# Altium PCB RoboMate.PcbDoc
Units mm, origin at the board's own origin, x right, y up, seen from the top; angles counter-clockwise.
Board outline 33.27 x 28.45 mm, 2 copper layers (Top Layer, Bottom Layer); 43 components, 18 nets, 128 pads, 361 vias.
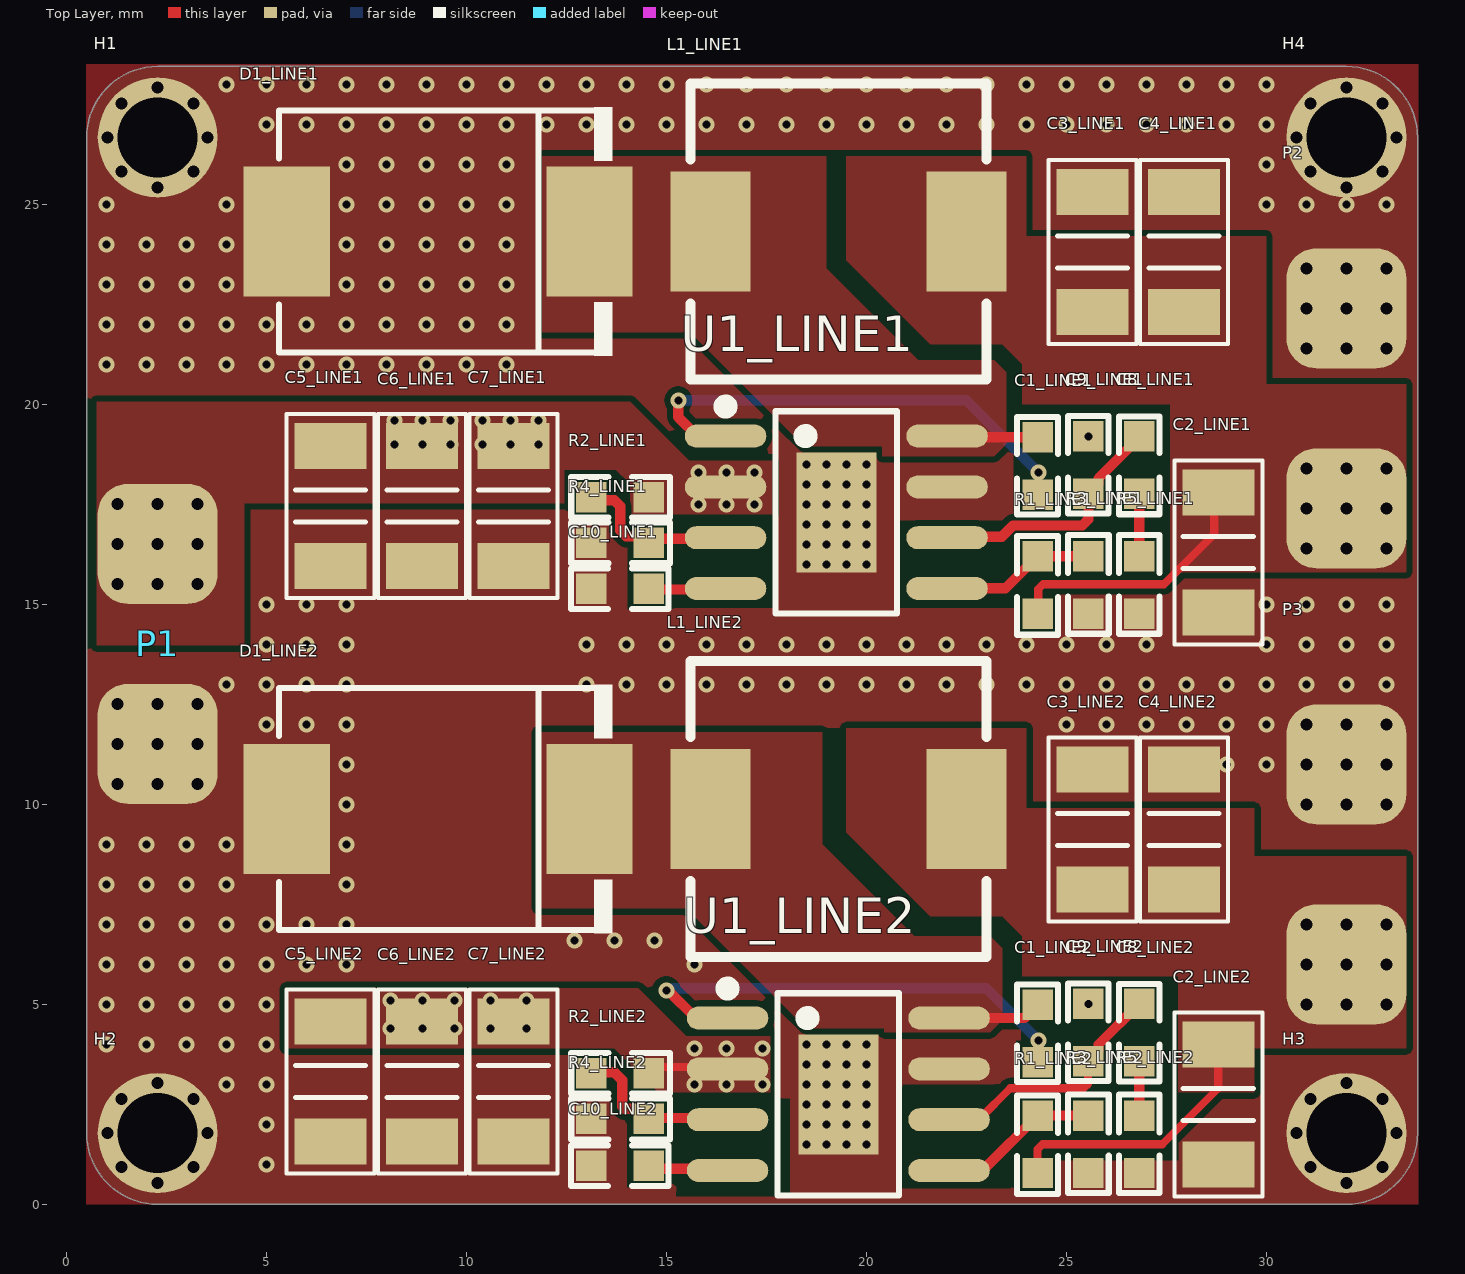
[diagram p0: Top Layer view]
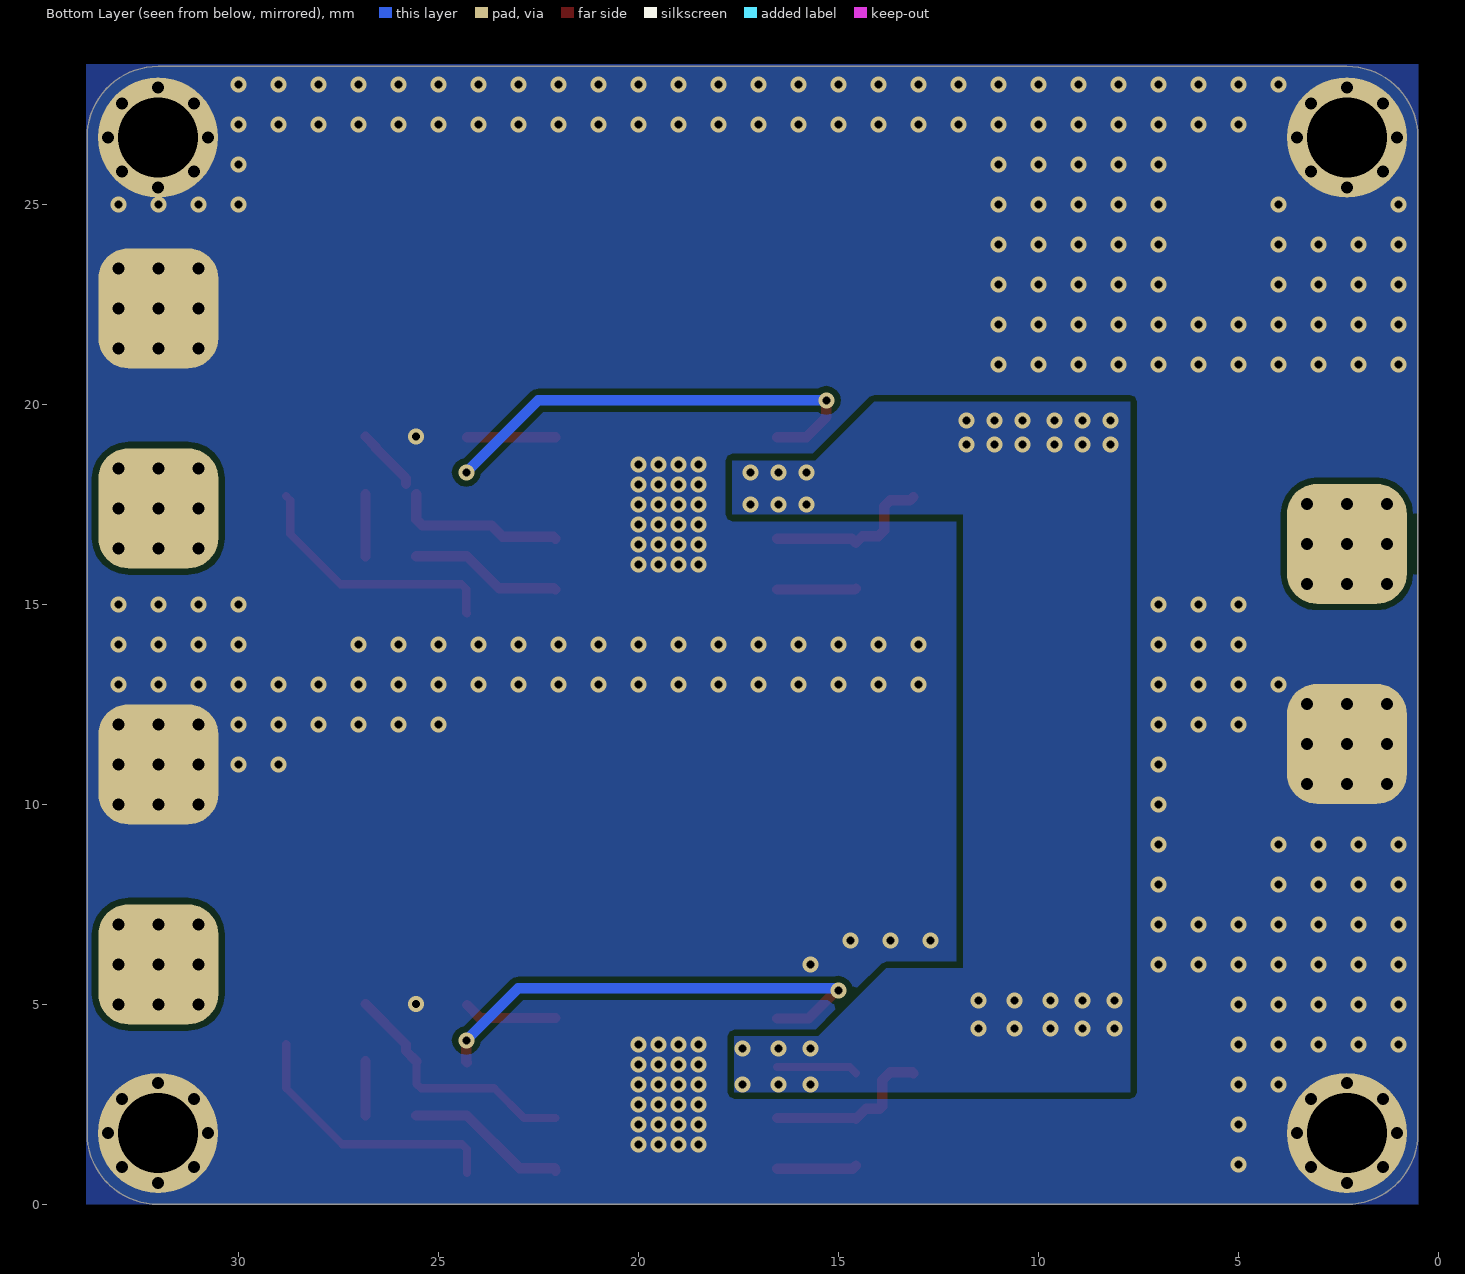
[diagram p1: Bottom Layer view, seen from below]
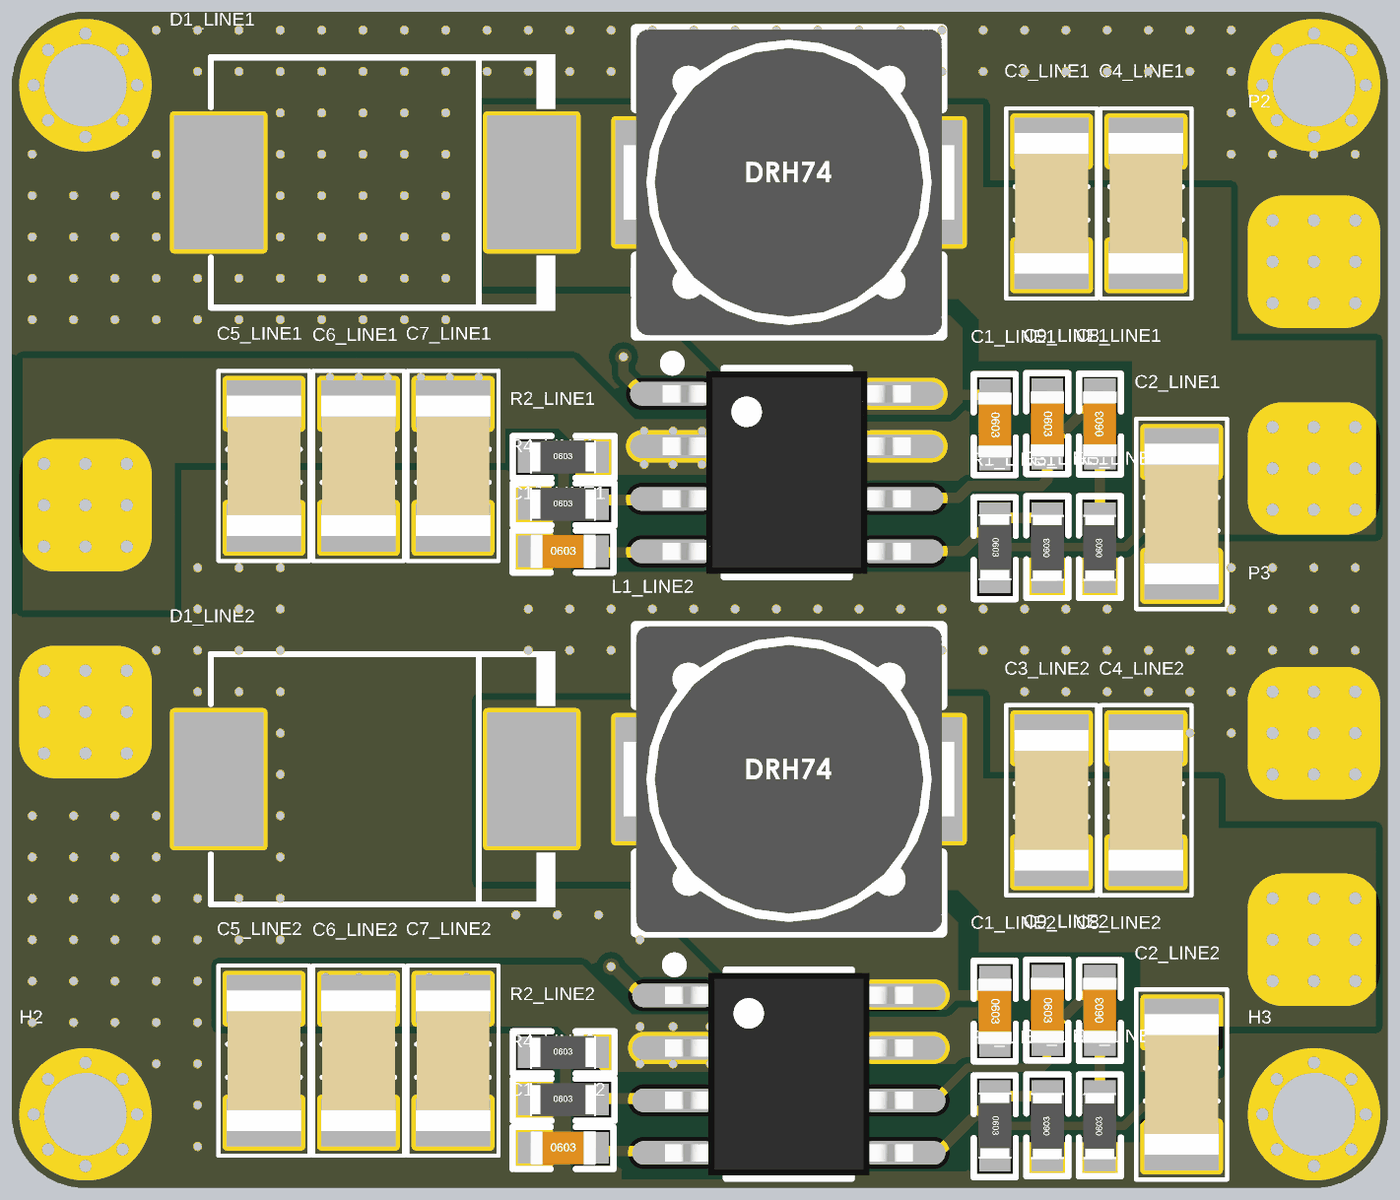
[diagram p2: 3D render of the assembled board from above, using the file's embedded part models]

## Layer stack, top to bottom
Top Solder: solder mask 0.0102, Solder Resist, Dk 3.5
Top Layer: signal copper 0.0356
Dielectric 1: dielectric 0.32, FR-4, Dk 4.8
Bottom Layer: signal copper 0.0356
Bottom Solder: solder mask 0.0102, Solder Resist, Dk 3.5

## Board outline
0.508,1.778 ccw(c2.286,1.778) 2.286,0 32.004,0 ccw(c32.004,1.778) 33.782,1.778 33.782,26.67 ccw(c32.004,26.67) 32.004,28.448 2.286,28.448 ccw(c2.286,26.67) 0.508,26.67

## Design rules (kind name [scope] priority, off if disabled: settings)
Clearance [All] p1: gap=0.152 ignorepadtopadclearanceinfootprint=FALSE
PlaneClearance [All] p1: clearance=0.102
PlaneConnect [All] p1: planeconnectstyle=Direct reliefexpansion=0.508 reliefentries=4 reliefconductorwidth=0.254 reliefairgap=0.254
PolygonConnect [All] p1: connectstyle=Direct reliefconductorwidth=0.254 reliefentries=4 polygonreliefangle="90 Angle" airgapwidth=0.254
RoutingVias [All] p1: holewidth=0.711 width=1.27 viastyle="Through Hole" minholewidth=0.711 minwidth=1.27 maxholewidth=0.711 maxwidth=1.27
SolderMaskExpansion [All] p1: expansion=0.102 istentingtop=FALSE
Width [All] p1: maxlimit=0.254 minlimit=0.203 preferedwidth=0.254
28 further rules are at their usual default settings.

## Classes and differential pairs
channel class Main: LINE1 LINE2
component class Top: H1 H2 H3 H4 P1 P2 P3
component class LINE2: C1_LINE2 C2_LINE2 C3_LINE2 C4_LINE2 C5_LINE2 C6_LINE2 C7_LINE2 C8_LINE2 C9_LINE2 C10_LINE2 D1_LINE2 L1_LINE2 R1_LINE2 R2_LINE2 R3_LINE2 R4_LINE2 R5_LINE2 U1_LINE2
component class LINE1: C1_LINE1 C2_LINE1 C3_LINE1 C4_LINE1 C5_LINE1 C6_LINE1 C7_LINE1 C8_LINE1 C9_LINE1 C10_LINE1 D1_LINE1 L1_LINE1 R1_LINE1 R2_LINE1 R3_LINE1 R4_LINE1 R5_LINE1 U1_LINE1

## Components (designator, comment, footprint, x,y, rotation, side; value= is the part's Value field where it differs from the comment)
C1_LINE1 "100nF" "C 0603" 24.282,18.453 r270 top (schematic designator C1)
C1_LINE2 "100nF" "C 0603" 24.282,4.269 r270 top (schematic designator C1)
C2_LINE1 "22uF" 1206-C 28.8,16.3 r90 top (schematic designator C2)
C2_LINE2 "22uF" 1206-C 28.8,2.5 r90 top (schematic designator C2)
C3_LINE1 "22uF" 1206-C 25.654,23.812 r270 top (schematic designator C3)
C3_LINE2 "22uF" 1206-C 25.654,9.374 r270 top (schematic designator C3)
C4_LINE1 "22uF" 1206-C 27.94,23.812 r270 top (schematic designator C4)
C4_LINE2 "22uF" 1206-C 27.94,9.374 r270 top (schematic designator C4)
C5_LINE1 "10UF" 1206-C 6.604,17.462 r90 top (schematic designator C5)
C5_LINE2 "10UF" 1206-C 6.604,3.075 r90 top (schematic designator C5)
C6_LINE1 "10UF" 1206-C 8.89,17.462 r90 top (schematic designator C6)
C6_LINE2 "10UF" 1206-C 8.89,3.075 r90 top (schematic designator C6)
C7_LINE1 "10NF" 1206-C 11.176,17.462 r90 top (schematic designator C7)
C7_LINE2 "10NF" 1206-C 11.176,3.075 r90 top (schematic designator C7)
C8_LINE1 "2.2nf" "C 0603" 26.822,18.478 r90 top (schematic designator C8)
C8_LINE2 "2.2nf" "C 0603" 26.822,4.294 r90 top (schematic designator C8)
C9_LINE1 "22pf" "C 0603" 25.552,18.478 r270 top (schematic designator C9)
C9_LINE2 "22pf" "C 0603" 25.552,4.294 r270 top (schematic designator C9)
C10_LINE1 "10NF" "C 0603" 13.843,15.392 r0 top (schematic designator C10)
C10_LINE2 "10nf" "C 0603" 13.843,0.965 r0 top (schematic designator C10)
D1_LINE1 "SS35" SMC_L6.9-W5.9-LS7.9-RD 9.296,24.32 r180 top (schematic designator D1)
D1_LINE2 "SS35" SMC_L6.9-W5.9-LS7.9-RD 9.296,9.882 r180 top (schematic designator D1)
H1 "" 铜柱-M2 2.286,26.67 r0 top
H2 "" 铜柱-M2 2.286,1.778 r0 top
H3 "" 铜柱-M2 32.004,1.778 r0 top
H4 "" 铜柱-M2 32.004,26.67 r0 top
L1_LINE1 "4.7uH" L-CDRH74R 19.304,24.32 r0 top (schematic designator L1)
L1_LINE2 "4.7uH" L-CDRH74R 19.304,9.882 r0 top (schematic designator L1)
P1 "BATIN" "XT30-HF - HALF" 2.286,16.51 r270 top
P2 "VOUT1" "XT30-HF - HALF" 32,17.4 r90 top
P3 "VOUT2" "XT30-HF - HALF" 32,6 r90 top
R1_LINE1 "16.7k" "R 0603" 24.282,15.484 r270 top (schematic designator R1)
R1_LINE2 "16.7k" "R 0603" 24.282,1.5 r270 top (schematic designator R1)
R2_LINE1 "4.7k" "R 0603" 13.843,17.678 r0 top (schematic designator R2)
R2_LINE2 "4.7k" "R 0603" 13.843,3.277 r0 top (schematic designator R2)
R3_LINE1 "5.1k" "R 0603" 25.552,15.484 r90 top (schematic designator R3)
R3_LINE2 "5.1k" "R 0603" 25.552,1.5 r90 top (schematic designator R3)
R4_LINE1 "1k" "R 0603" 13.843,16.535 r0 top (schematic designator R4)
R4_LINE2 "1k" "R 0603" 13.843,2.134 r0 top (schematic designator R4)
R5_LINE1 "37.4k" "R 0603" 26.822,15.484 r90 top (schematic designator R5)
R5_LINE2 "37.4k" "R 0603" 26.822,1.5 r90 top (schematic designator R5)
U1_LINE1 "TPS54531DDAR" SOIC-8_L5.0-W4.0-P1.27-LS6.0-BL-EP 19.25,17.3 r270 top (schematic designator U1)
U1_LINE2 "TPS54531DDAR" SOIC-8_L5.0-W4.0-P1.27-LS6.0-BL-EP 19.3,2.75 r270 top (schematic designator U1)

## Footprints (in the part's own frame and the unit in brackets; to place one, negate y for a bottom-side part, rotate by r counter-clockwise, add the part's x,y. Pads: shape width x height; smd on the part's side, far side on the other; paste and mask are expansions set on the pad)
1206-C [mm] "Chip Capacitor, Body 3.2x1.6mm, 1206, IPC Medium Density"
  rect 1.15x1.8 smd: 1(-1.5,0) 2(1.5,0)
  silkscreen extent -2.3,-1.1 2.3,1.1, body extent -1.7,-0.9 1.7,0.9, height 1.74
"C 0603" [mil]
  rect 30x30 smd: 1(-28.25,0) 2(28.25,0)
  silkscreen extent -48,-20 48,20, body extent -31,-16 32,16, height 32
L-CDRH74R [mm]
  rect 2x3 smd: 1(-3.2,0) 2(3.2,0)
  silkscreen extent -3.7,-3.7 3.7,3.7, body extent -4,-3.7 4,3.7, height 4.5
"R 0603" [mil]
  rect 30x30 smd: 1(-28.25,0) 2(28.25,0)
  silkscreen extent -48,-20 49,20, body extent -32,-16 31,16, height 16
SMC_L6.9-W5.9-LS7.9-RD [mm]
  rect 2.158x3.24 smd: 1(3.786,0) 2(-3.786,0)
  silkscreen extent -4.36,-3.1 3.98,3.1
SOIC-8_L5.0-W4.0-P1.27-LS6.0-BL-EP [mm]
  oval 0.574x2.038 smd: 1(-1.905,-2.769) 2(-0.635,-2.769) 3(0.635,-2.769) 4(1.905,-2.769) 5(1.905,2.769) 6(0.635,2.769) 7(-0.635,2.769) 8(-1.905,2.769)
  rect 3x2 smd: 9(0,0)
  silkscreen extent -2.79,-2.92 2.53,1.52, body extent -2.45,-3 2.45,3, height 1.75
"XT30-HF - HALF" [mm]
  rrect50% 3x3 hole 0.3 unplated mask+0.102: 1(0,0) 2(5,0)
铜柱-M2 [mm] "TZ-M3"
  round 0.5 hole 0.3: 0(-1.25,0) 0(-0.9,-0.85) 0(-0.9,0.85) 0(0,-1.25) 0(0,1.25) 0(0.9,-0.85) 0(0.9,0.85) 0(1.25,0)
  round 3 hole 2: 0(0,0)

## Part data
C1_LINE1 C1_LINE2 C8_LINE1 C8_LINE2 C9_LINE1 C9_LINE2 C10_LINE1 C10_LINE2: library part C
C2_LINE1 C2_LINE2 C3_LINE1 C3_LINE2 C4_LINE1 C4_LINE2 C5_LINE1 C5_LINE2 C6_LINE1 C6_LINE2 C7_LINE1 C7_LINE2: library part CAP, "陶瓷电容"
D1_LINE1 D1_LINE2: library part "D Schottky", "Schottky Diode", Code_JEDEC=DO-214-AA, LatestRevisionDate=17-Jul-2002, LatestRevisionNote="Re-released for DXP Platform.", PackageReference=SMB, Published=8-Jun-2000, Publisher="Altium Limited"
H1 H2 H3 H4: library part HOLE
L1_LINE1 L1_LINE2: library part INDUCTOR-SMD, "贴片屏蔽电感"
P1 P2 P3: library part "Header 2", "Header, 2-Pin", LatestRevisionDate=17-Jul-2002, LatestRevisionNote="Re-released for DXP Platform.", Publisher="Altium Limited"
R1_LINE1 R1_LINE2 R2_LINE1 R2_LINE2 R3_LINE1 R3_LINE2 R4_LINE1 R4_LINE2 R5_LINE1 R5_LINE2: library part R
U1_LINE1 U1_LINE2: BOM_LCSC Assembly=Yes, BOM_Manufacturer=TI, BOM_Manufacturer Part=TPS79333DBVR, BOM_Supplier=LCSC, BOM_Supplier Part=C9840, image=//image.lceda.cn/szlcsc/C9840.jpg, SMT Type=Extend, spicePre=X, spiceSymbolName=TPS79333DBVR

## Via types
v1: diameter 0.4, hole 0.2, Top Layer to Bottom Layer, tented both sides, 307 vias
v2: diameter 0.5, hole 0.3, Top Layer to Bottom Layer, tented both sides, 54 vias

## Nets (pads, with @x,y where several pads share a name; then routed paths per layer and width w, separated by ;. In a path a pad name is that pad's centre, name@x,y a point inside that pad or via, vN(x,y) a via of type N, cw(c..) or ccw(c..) an arc to the next point about the centre after c; other vN are vias at no path point)
GND: C2_LINE1.1 C2_LINE2.1 C3_LINE1.1 C3_LINE2.1 C4_LINE1.1 C4_LINE2.1 C5_LINE1.1 C5_LINE2.1 C6_LINE1.1 C6_LINE2.1 C7_LINE1.1 C7_LINE2.1 C9_LINE1.1 C9_LINE2.1 C10_LINE1.1 C10_LINE2.1 D1_LINE1.1 D1_LINE2.1 H1.0 H2.0 H3.0 H4.0 P1.2 P2.2 P3.2 R3_LINE1.1 R3_LINE2.1 R4_LINE1.1 R4_LINE2.1 R5_LINE1.1 R5_LINE2.1 U1_LINE1.7 U1_LINE1.9 U1_LINE2.7 U1_LINE2.9
  other v1: 5,1 18.5,1.5 19,1.5 19.5,1.5 20,1.5 5,2 18.5,2 19,2 19.5,2 20,2 18.5,2.5 19,2.5 19.5,2.5 20,2.5 4,3 5,3 18.5,3 19,3 19.5,3 20,3 18.5,3.5 19,3.5 19.5,3.5 20,3.5 1,4 2,4 3,4 4,4 5,4 18.5,4 19,4 19.5,4 20,4 1,5 2,5 3,5 4,5 5,5 25.552,5.012 1,6 2,6 3,6 4,6 5,6 6,6 7,6 15.7,6 12.7,6.6 13.7,6.6 14.7,6.6 1,7 2,7 3,7 4,7 5,7 6,7 7,7 1,8 2,8 3,8 4,8 7,8 1,9 2,9 3,9 4,9 7,9 7,10 7,11 29,11 30,11 5,12 6,12 7,12 25,12 26,12 27,12 28,12 29,12 30,12 4,13 5,13 6,13 7,13 13,13 14,13 15,13 16,13 17,13 18,13 19,13 20,13 21,13 22,13 23,13 24,13 25,13 26,13 27,13 28,13 29,13 30,13 31,13 32,13 33,13 5,14 6,14 7,14 13,14 14,14 15,14 16,14 17,14 18,14 19,14 20,14 21,14 22,14 23,14 24,14 25,14 26,14 27,14 30,14 31,14 32,14 33,14 5,15 6,15 7,15 30,15 31,15 32,15 33,15 18.5,16 19,16 19.5,16 20,16 18.5,16.5 19,16.5 19.5,16.5 20,16.5 18.5,17 19,17 19.5,17 20,17 18.5,17.5 19,17.5 19.5,17.5 20,17.5 18.5,18 19,18 19.5,18 20,18 18.5,18.5 19,18.5 19.5,18.5 20,18.5 25.552,19.196 1,21 2,21 3,21 4,21 5,21 6,21 7,21 8,21 9,21 10,21 11,21 1,22 2,22 3,22 4,22 5,22 6,22 7,22 8,22 9,22 10,22 11,22 1,23 2,23 3,23 4,23 7,23 8,23 9,23 10,23 11,23 1,24 2,24 3,24 4,24 7,24 8,24 9,24 10,24 11,24 1,25 4,25 7,25 8,25 9,25 10,25 11,25 30,25 31,25 32,25 33,25 7,26 8,26 9,26 10,26 11,26 30,26 5,27 6,27 7,27 8,27 9,27 10,27 11,27 12,27 13,27 14,27 15,27 16,27 17,27 18,27 19,27 20,27 21,27 22,27 23,27 24,27 25,27 26,27 27,27 28,27 29,27 30,27 4,28 5,28 6,28 7,28 8,28 9,28 10,28 11,28 12,28 13,28 14,28 15,28 16,28 17,28 18,28 19,28 20,28 21,28 22,28 23,28 24,28 25,28 26,28 27,28 28,28 29,28 30,28
  other v2: 31,10 32,10 33,10 1.286,10.51 2.286,10.51 3.286,10.51 31,11 32,11 33,11 1.286,11.51 2.286,11.51 3.286,11.51 31,12 32,12 33,12 1.286,12.51 2.286,12.51 3.286,12.51 31,21.4 32,21.4 33,21.4 31,22.4 32,22.4 33,22.4 31,23.4 32,23.4 33,23.4
NetC1_LINE1_1: C1_LINE1.1 D1_LINE1.2 L1_LINE1.1 U1_LINE1.8 | length 2.2
  Top Layer w0.254: U1_LINE1.8@22.073,19.177 24.276,19.177 C1_LINE1.1
NetC1_LINE1_2: C1_LINE1.2 U1_LINE1.1 | length 11.6
  Top Layer w0.254: v1(15.3,20.1) 15.3,19.68 15.803,19.177 U1_LINE1.1@16.535,19.177
  Bottom Layer w0.254: v1(15.3,20.1) 22.5,20.1 v1(24.3,18.3)
NetC1_LINE2_1: C1_LINE2.1 D1_LINE2.2 L1_LINE2.1 U1_LINE2.8 | length 2.4
  Top Layer w0.254: U1_LINE2.8 23.95,4.655 C1_LINE2.1
NetC1_LINE2_2: C1_LINE2.2 U1_LINE2.1 | length 12.2
  Top Layer w0.254: v1(15,5.35) 15.04,5.35 15.741,4.649 U1_LINE2.1@16.535,4.649 ; C1_LINE2.2 24.3,3.57 v1(24.3,4.1)
  Bottom Layer w0.254: v1@15,5.4 23,5.4 v1(24.3,4.1)
NetC2_LINE1_2: C2_LINE1.2 C3_LINE1.2 C4_LINE1.2 L1_LINE1.2 P2.1 R1_LINE1.2 | length 6.6
  Top Layer w0.203: R1_LINE1.2 24.3,14.784 24.3,15.381 24.419,15.5 27.444,15.5 28.7,16.756 28.7,17.6 C2_LINE1.2@28.8,17.7
  other v2: 31,16.4 32,16.4 33,16.4 31,17.4 32,17.4 33,17.4 31,18.4 32,18.4 33,18.4
NetC2_LINE2_2: C2_LINE2.2 C3_LINE2.2 C4_LINE2.2 L1_LINE2.2 P3.1 R1_LINE2.2 | length 6.8
  Top Layer w0.203: R1_LINE2.2 24.282,1.375 24.407,1.5 27.4,1.5 28.8,2.9 C2_LINE2.2
  other v2: 31,5 32,5 33,5 31,6 32,6 33,6 31,7 32,7 33,7
NetC5_LINE1_2: C5_LINE1.2 C5_LINE2.2 C6_LINE1.2 C6_LINE2.2 C7_LINE1.2 C7_LINE2.2 P1.1 R2_LINE1.2 R2_LINE2.2 U1_LINE1.2 U1_LINE2.2 | length 2
  Top Layer w0.203: R2_LINE2.2 14.713,3.429 U1_LINE2.2@16.535,3.429
  other v1: 15.7,3 16.5,3 17.4,3 15.7,3.9 16.5,3.9 17.4,3.9 8.1,4.4 8.9,4.4 9.7,4.4 10.6,4.4 11.5,4.4 8.1,5.1 8.9,5.1 9.7,5.1 10.6,5.1 11.5,5.1 15.8,17.5 16.5,17.5 17.2,17.5 15.8,18.3 16.5,18.3 17.2,18.3 8.2,19 8.9,19 9.6,19 10.4,19 11.1,19 11.8,19 8.2,19.6 8.9,19.6 9.6,19.6 10.4,19.6 11.1,19.6 11.8,19.6
  other v2: 1.286,15.51 2.286,15.51 3.286,15.51 1.286,16.51 2.286,16.51 3.286,16.51 1.286,17.51 2.286,17.51 3.286,17.51
NetC8_LINE1_1: C8_LINE1.1 R5_LINE1.2 | length 1.6
  Top Layer w0.254: R5_LINE1.2 C8_LINE1.1
NetC8_LINE1_2: C8_LINE1.2 C9_LINE1.2 U1_LINE1.6 | length 5.9
  Top Layer w0.254: U1_LINE1.6@22.073,16.637 22.125,16.689 23.389,16.689 23.674,16.974 25.403,16.974 25.552,17.122 C9_LINE1.2 ; C9_LINE1.2@25.806,18.014 25.806,18.149 26.568,18.911 26.568,18.942 C8_LINE1.2
NetC8_LINE2_1: C8_LINE2.1 R5_LINE2.2 | length 1.4
  Top Layer w0.254: R5_LINE2.2 C8_LINE2.1
NetC8_LINE2_2: C8_LINE2.2 C9_LINE2.2 U1_LINE2.6 | length 6.4
  Top Layer w0.203: U1_LINE2.6@22.073,2.159 22.859,2.159 23.6,2.9 25.431,2.9 25.541,3.01 25.541,3.566 C9_LINE2.2
  Top Layer w0.254: C9_LINE2.2 25.806,3.83 25.806,3.996 C8_LINE2.2
NetC10_LINE1_2: C10_LINE1.2 U1_LINE1.4 | length 2
  Top Layer w0.254: C10_LINE1.2 14.586,15.367 U1_LINE1.4@16.535,15.367
NetC10_LINE2_2: C10_LINE2.2 U1_LINE2.4 | length 2
  Top Layer w0.254: C10_LINE2.2 14.637,0.889 U1_LINE2.4@16.535,0.889
NetR1_LINE1_1: R1_LINE1.1 R3_LINE1.2 U1_LINE1.5 | length 3.8
  Top Layer w0.254: U1_LINE1.5@22.073,15.367 22.106,15.4 23.48,15.4 R1_LINE1.1 R3_LINE1.2
NetR1_LINE2_1: R1_LINE2.1 R3_LINE2.2 U1_LINE2.5 | length 4
  Top Layer w0.254: U1_LINE2.5@22.073,0.839 U1_LINE2.5@22.084,0.85 ; U1_LINE2.5@22.084,0.9 22.964,0.9 R1_LINE2.1 R3_LINE2.2
NetR2_LINE1_1: R2_LINE1.1 R4_LINE1.2 U1_LINE1.3 | length 4.3
  Top Layer w0.254: R2_LINE1.1 13.204,17.6 13.7,17.6 13.85,17.45 13.85,16.85 14,16.7 14.396,16.7 R4_LINE1.2 14.662,16.637 U1_LINE1.3@16.535,16.637
NetR2_LINE2_1: R2_LINE2.1 R4_LINE2.2 U1_LINE2.3 | length 4.3
  Top Layer w0.254: R2_LINE2.1 13.149,3.3 13.7,3.3 13.9,3.1 13.9,2.449 13.961,2.388 14.307,2.388 R4_LINE2.2 14.586,2.159 U1_LINE2.3@16.535,2.159

## Polygon pours and split planes (outlines as drawn)
no net on Bottom Solder (solid): 18.1,4.064 20.5,4.064 20.5,1.524 18.1,1.524
no net on Bottom Solder (solid): 18.05,18.542 20.45,18.542 20.45,16.002 18.05,16.002
GND on Top Layer "GND_L01_P028" (solid, remove dead copper, pour order 28): 0.5,0 0.5,28.5 33.8,28.5 33.8,0
NetC5_LINE1_2 on Top Layer "NETC5_LINE1_2_L01_P000" (solid, pour order 0): 0.762,13.97 4.445,13.97 4.445,17.526 12.446,17.526 12.446,20.066 0.762,20.066
NetC5_LINE1_2 on Top Layer "NETC5_LINE1_2_L01_P002" (solid, pour order 2): 12.446,20.066 14.097,20.066 15.57,18.593 17.653,18.593 17.653,17.247 14.097,17.247 14.097,18.009 13.741,18.364 12.446,18.364
NetC1_LINE1_1 on Top Layer "NETC1_LINE1_1_L01_P009" (solid, remove dead copper, pour order 9): 11.9,26.2 19,26.2 19,23.4 21.3,21.1 23.2,21.1 23.5,20.8 23.5,19 23.2,18.7 18.7,18.7 15.6,21.8 11.9,21.8
NetC2_LINE1_2 on Top Layer "NETC2_LINE1_2_L01_P011" (solid, pour order 11): 19.5,24.2 30,24.2 30,17.1 27.6,17.1 27.6,20 23.9,20 23.9,21 23.4,21.5 21.6,21.5 19.5,23.6
NetC2_LINE1_2 on Top Layer "NETC2_LINE1_2_L01_P012" (solid, pour order 12): 19.5,24.2 19.5,26.2 24,26.2 24,24.2
GND on Top Layer "GND_L01_P013" (solid, pour order 13): 18,18.5 23.5,18.5 23.5,17.3 20.8,17.3 20.8,14.8 18,14.8
NetC1_LINE2_1 on Top Layer "NETC1_LINE2_1_L01_P014" (solid, remove dead copper, pour order 14): 11.8,11.8 18.9,11.8 18.9,9 21.2,6.7 23.1,6.7 23.4,6.4 23.4,4.6 23.1,4.3 18.6,4.3 15.5,7.4 11.8,7.4
NetC2_LINE2_2 on Top Layer "NETC2_LINE2_2_L01_P015" (solid, pour order 15): 19.5,9.9 29.7,9.9 29.7,2.8 27.7,2.8 27.7,5.7 23.9,5.7 23.9,6.7 23.4,7.2 21.6,7.2 19.5,9.3
NetC2_LINE2_2 on Top Layer "NETC2_LINE2_2_L01_P017" (solid, pour order 17): 19.5,11.9 24,11.9 24,9.9 19.5,9.9
NetC2_LINE2_2 on Top Layer "NETC2_LINE2_2_L01_P018" (solid, pour order 18): 29.5,8.7 33.5,8.7 33.5,3.9 29.5,3.9
NetC2_LINE1_2 on Top Layer "NETC2_LINE1_2_L01_P019" (solid, pour order 19): 27.6,20.5 33.5,20.5 33.5,15.8 27.6,15.8
NetC5_LINE1_2 on Top Layer "NETC5_LINE1_2_L01_P021" (solid, pour order 21): 5.5,5.4 14.3,5.4 15.5,4.2 17.6,4.2 17.6,2.8 14.8,2.8 13.7,3.9 5.5,3.9
GND on Top Layer "GND_L01_P023" (solid, pour order 23): 17.9,4.1 23.2,4.1 23.2,2.945 20.643,2.945 20.643,0.2 17.9,0.2
GND on Bottom Layer "GND_L02_P027" (solid, pour order 27): 0.5,0 0.5,28.5 33.8,28.5 33.8,0
GND on Bottom Layer "GND_L02_P026" (solid, pour order 26): 18,18.5 20.75,18.5 20.8,18.45 20.8,14.8 18,14.8
NetC5_LINE1_2 on Bottom Layer "NETC5_LINE1_2_L02_P022" (solid, pour order 22): 11.8,5.9 13.8,5.9 15.5,4.2 17.6,4.2 17.6,2.8 11.8,2.8
NetC5_LINE1_2 on Bottom Layer "NETC5_LINE1_2_L02_P020" (solid, pour order 20): 7.7,18.364 11.871,18.364 11.871,13.771 11.871,2.8 7.7,2.8
NetC5_LINE1_2 on Bottom Layer "NETC5_LINE1_2_L02_P006" (solid, pour order 6): 7.7,20.066 14.097,20.066 15.57,18.593 17.653,18.593 17.653,17.247 14.097,17.247 7.7,17.247

## Other copper
Top Layer:
  pour cut-out: 18.9,11.965 18.965,11.9 19.5,11.9 19.5,10.9 18.9,10.9
  pour cut-out: 19,26.365 19.5,26.365 19.5,25.9 19,25.9
  pour cut-out: 20.8,17.1 23.8,17.1 23.8,14.9 20.8,14.9
  pour cut-out: 15.1,17.1 17.635,17.1 17.7,17.035 17.7,14.9 15.135,14.9 15.094,14.859
  pour cut-out: 15.348,2.652 18.1,2.652 18.1,0.2 15.254,0.2
  pour cut-out: 20.9,3 23.749,3 23.749,0.549 23.6,0.4 20.8,0.4
  pour cut-out: 23.674,20 27.6,20 27.6,15.4 23.674,15.4
  pour cut-out: 23.874,5.7 27.8,5.7 27.8,1.1 23.874,1.1

## Silkscreen, mask and mechanical layers (free items; w line width, h text height)
Mechanical 1:
  lines w0.152: 0.508,26.642 0.508,1.778 ccw(c2.286,1.778) 2.286,0 32.004,0 ccw(c32.004,1.778) 33.782,1.778 33.782,26.642 ; 0.508,26.67 cw(c2.286,26.67) 2.286,28.448 ; 2.314,28.448 31.976,28.448 ; 32.004,28.448 cw(c32.004,26.67) 33.782,26.67

## Text inside footprints (layer, text, board x,y; h text height)
P1: Mechanical 15 "XT30" at -3.908,17.01 h0.51 r270
P2: Mechanical 15 "XT30" at 38.194,16.9 h0.51 r90
P3: Mechanical 15 "XT30" at 38.194,5.5 h0.51 r90